# Altium PCB high_voltage_controller.PcbDoc (part 2 of 4)
Units mil, origin at the board's own origin, x right, y up, seen from the top; angles counter-clockwise.
Board outline 3135 x 1815 mil, 4 copper layers (Signal 1, Ground, Power, Signal 2), stack 23.756 mil thick; 57 components, 42 nets, 253 pads, 87 vias.
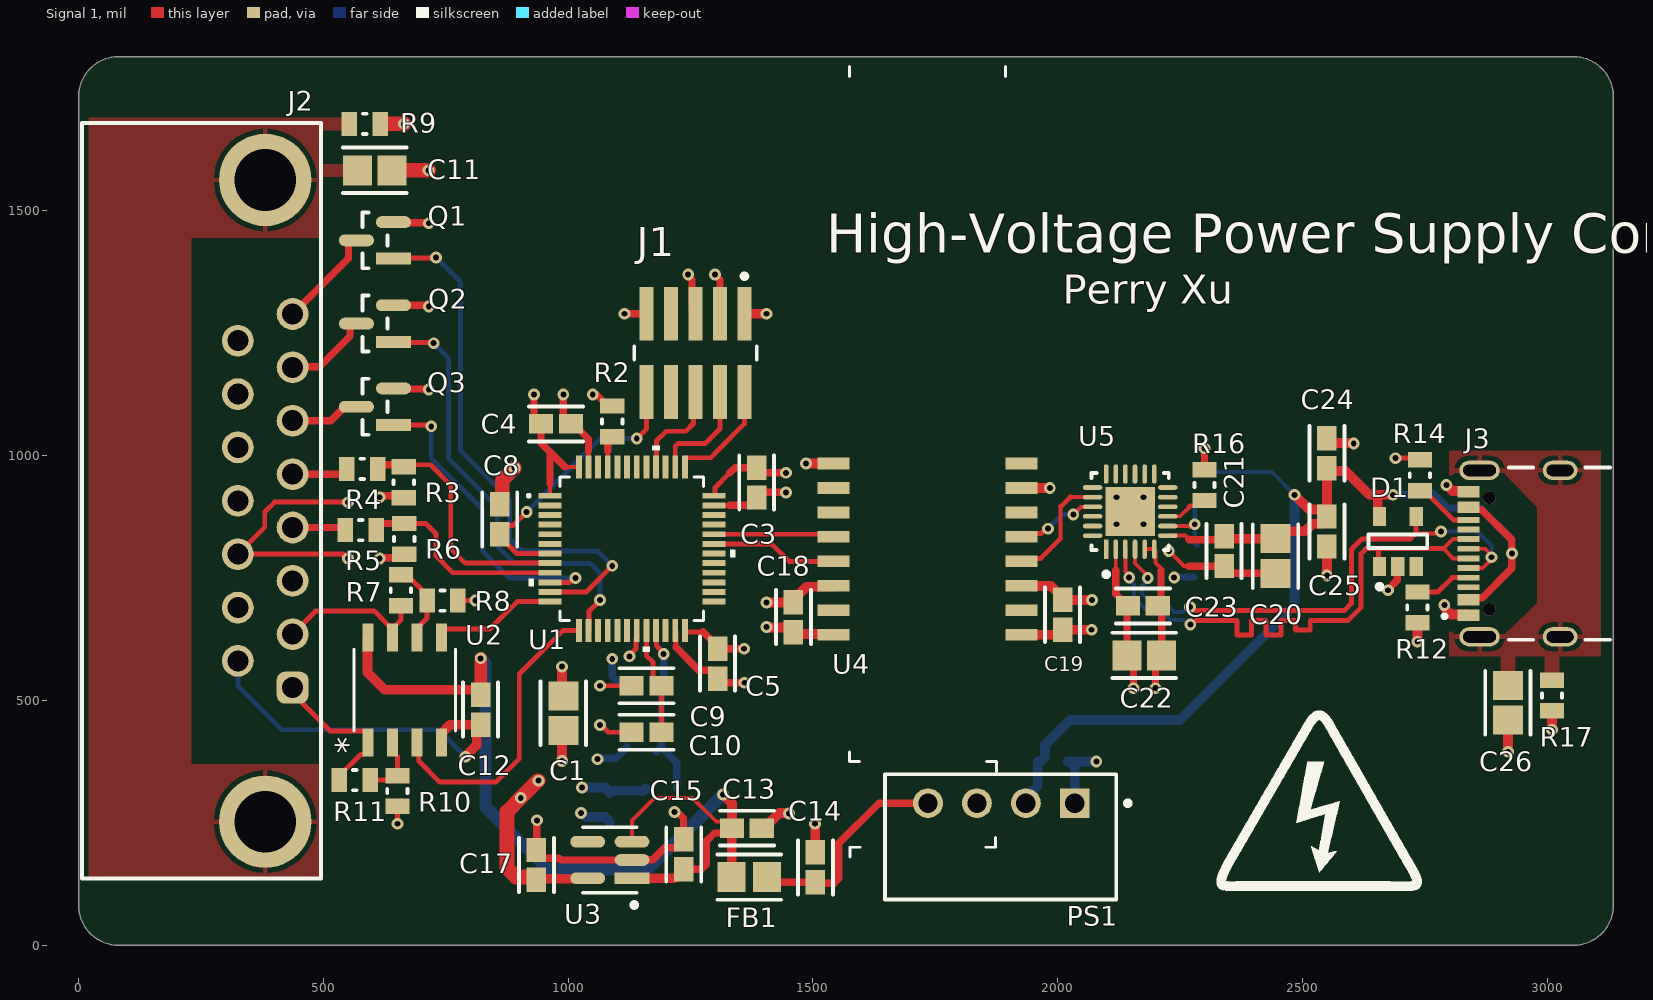
[diagram p0: Signal 1 view]

## Part data (continued)
C12 C15 C17: library part CC0603KRX7R7BB105, "16V 1uF X7R ±10% 0603 Multilayer Ceramic Capacitors MLCC - SMD/SMT ROHS", Case Code (Imperial)=0603, Case Code (Metric)=1608, Dielectric=X7R, Dielectric Material=Ceramic, Manufacturer="Yageo Group", Max Operating Temperature=125°C, Min Operating Temperature=-55°C, Supplier Part Number=311-1446-1-ND, Tolerance=10%, Voltage=16V, Case/Package=0603, Category="Ceramic Capacitors", China RoHS=Compliant, ComponentLink1Description=https://datasheet.octopart.com:443/CC0603KRX7R7BB105-Yageo-datasheet-177165144.pdf?src-supplier=IHS, ComponentLink1URL=https://datasheet.octopart.com:443/CC0603KRX7R7BB105-Yageo-datasheet-177165144.pdf?src-supplier=IHS, ComponentLink2Description=https://datasheet.octopart.com:443/CC0603KRX7R7BB105-Yageo-datasheet-82288757.pdf?src-supplier=Upverter, ComponentLink2URL=https://datasheet.octopart.com:443/CC0603KRX7R7BB105-Yageo-datasheet-82288757.pdf?src-supplier=Upverter, ComponentLink3Description=https://datasheet.octopart.com/CC0603KRX7R7BB105-Yageo-datasheet-10883670.pdf, ComponentLink3URL=https://datasheet.octopart.com/CC0603KRX7R7BB105-Yageo-datasheet-10883670.pdf, ComponentLink4Description=https://datasheet.octopart.com/CC0603KRX7R7BB105-Yageo-datasheet-12526321.pdf, ComponentLink4URL=https://datasheet.octopart.com/CC0603KRX7R7BB105-Yageo-datasheet-12526321.pdf, ComponentLink5Description=https://datasheet.octopart.com:443/CC0603KRX7R7BB105-Yageo-datasheet-181968648.pdf?src-supplier=Newark, ComponentLink5URL=https://datasheet.octopart.com:443/CC0603KRX7R7BB105-Yageo-datasheet-181968648.pdf?src-supplier=Newark, ComponentLink6Description=https://datasheet.octopart.com:443/CC0603KRX7R7BB105-Yageo-datasheet-181968639.pdf?src-supplier=Newark, ComponentLink6URL=https://datasheet.octopart.com:443/CC0603KRX7R7BB105-Yageo-datasheet-181968639.pdf?src-supplier=Newark, ComponentLink7Description=https://datasheet.octopart.com:443/CC0603KRX7R7BB105-Yageo-datasheet-519481.pdf?src-supplier=Newark, ComponentLink7URL=https://datasheet.octopart.com:443/CC0603KRX7R7BB105-Yageo-datasheet-519481.pdf?src-supplier=Newark, ComponentLink8Description=https://datasheet.octopart.com:443/CC0603KRX7R7BB105-Yageo-datasheet-147453679.pdf?src-supplier=Newark, ComponentLink8URL=https://datasheet.octopart.com:443/CC0603KRX7R7BB105-Yageo-datasheet-147453679.pdf?src-supplier=Newark, ComponentLink9Description=https://datasheet.octopart.com:443/CC0603KRX7R7BB105-Yageo-datasheet-62336348.pdf?src-supplier=Farnell, ComponentLink9URL=https://datasheet.octopart.com:443/CC0603KRX7R7BB105-Yageo-datasheet-62336348.pdf?src-supplier=Farnell, ComponentLink10Description=https://datasheet.octopart.com:443/CC0603KRX7R7BB105-Yageo-datasheet-151948686.pdf?src-supplier=Farnell, ComponentLink10URL=https://datasheet.octopart.com:443/CC0603KRX7R7BB105-Yageo-datasheet-151948686.pdf?src-supplier=Farnell, ComponentLink11Description=https://datasheet.octopart.com:443/CC0603KRX7R7BB105-Yageo-datasheet-15895757.pdf?src-supplier=element14+APAC, ComponentLink11URL=https://datasheet.octopart.com:443/CC0603KRX7R7BB105-Yageo-datasheet-15895757.pdf?src-supplier=element14+APAC, ComponentLink12Description=https://datasheet.octopart.com:443/CC0603KRX7R7BB105-Yageo-datasheet-166511530.pdf?src-supplier=Future+Electronics, ComponentLink12URL=https://datasheet.octopart.com:443/CC0603KRX7R7BB105-Yageo-datasheet-166511530.pdf?src-supplier=Future+Electronics, ComponentLink13Description=https://datasheet.octopart.com:443/CC0603KRX7R7BB105-Yageo-datasheet-137700082.pdf?src-supplier=Future+Electronics, ComponentLink13URL=https://datasheet.octopart.com:443/CC0603KRX7R7BB105-Yageo-datasheet-137700082.pdf?src-supplier=Future+Electronics, ComponentLink14Description=https://datasheet.octopart.com:443/CC0603KRX7R7BB105-Yageo-datasheet-137700084.pdf?src-supplier=Future+Electronics, ComponentLink14URL=https://datasheet.octopart.com:443/CC0603KRX7R7BB105-Yageo-datasheet-137700084.pdf?src-supplier=Future+Electronics, ComponentLink15Description=https://datasheet.octopart.com:443/CC0603KRX7R7BB105-Yageo-datasheet-27626582.pdf?src-supplier=Future+Electronics, ComponentLink15URL=https://datasheet.octopart.com:443/CC0603KRX7R7BB105-Yageo-datasheet-27626582.pdf?src-supplier=Future+Electronics, ComponentLink16Description=https://datasheet.octopart.com:443/CC0603KRX7R7BB105-Yageo-Group-datasheet-165992755.pdf?src-supplier=ODG+(Origin+Data+Global), ComponentLink16URL=https://datasheet.octopart.com:443/CC0603KRX7R7BB105-Yageo-Group-datasheet-165992755.pdf?src-supplier=ODG+(Origin+Data+Global), ComponentLink17Description=https://datasheet.octopart.com:443/CC0603KRX7R7BB105-Yageo-datasheet-140260305.pdf?src-supplier=SOS+electronic, ComponentLink17URL=https://datasheet.octopart.com:443/CC0603KRX7R7BB105-Yageo-datasheet-140260305.pdf?src-supplier=SOS+electronic, ComponentLink18Description=https://datasheet.octopart.com:443/CC0603KRX7R7BB105-Yageo-datasheet-8701427.pdf?src-supplier=element14, ComponentLink18URL=https://datasheet.octopart.com:443/CC0603KRX7R7BB105-Yageo-datasheet-8701427.pdf?src-supplier=element14, ComponentLink19Description=https://datasheet.octopart.com:443/CC0603KRX7R7BB105-Yageo-datasheet-499490.pdf?src-supplier=element14, ComponentLink19URL=https://datasheet.octopart.com:443/CC0603KRX7R7BB105-Yageo-datasheet-499490.pdf?src-supplier=element14, ComponentLink20Description=https://datasheet.octopart.com:443/CC0603KRX7R7BB105-Yageo-datasheet-5301394.pdf?src-supplier=element14, ComponentLink20URL=https://datasheet.octopart.com:443/CC0603KRX7R7BB105-Yageo-datasheet-5301394.pdf?src-supplier=element14, ComponentLink21Description=https://datasheet.octopart.com:443/CC0603KRX7R7BB105-Yageo-datasheet-17600895.pdf?src-supplier=TME, ComponentLink21URL=https://datasheet.octopart.com:443/CC0603KRX7R7BB105-Yageo-datasheet-17600895.pdf?src-supplier=TME, ComponentLink22Description=http://sigma.octopart.com:80/rohs_statement/Surface-Mount-Ceramic-Multilayer-Capacitors%3B-General-Purpose-%26-High-Capacitance-Class-2%2C-X7R-Yageo-family-124.pdf?src-supplier=Compliance+Statements, ComponentLink22URL=http://sigma.octopart.com:80/rohs_statement/Surface-Mount-Ceramic-Multilayer-Capacitors%3B-General-Purpose-%26-High-Capacitance-Class-2%2C-X7R-Yageo-family-124.pdf?src-supplier=Compliance+Statements, ComponentLink23Description=http://sigma.octopart.com:80/reach_statement/Surface-Mount-Ceramic-Multilayer-Capacitors%3B-General-Purpose-%26-High-Capacitance-Class-2%2C-X7R-Yageo-family-125.pdf?src-supplier=Compliance+Statements, ComponentLink23URL=http://sigma.octopart.com:80/reach_statement/Surface-Mount-Ceramic-Multilayer-Capacitors%3B-General-Purpose-%26-High-Capacitance-Class-2%2C-X7R-Yageo-family-125.pdf?src-supplier=Compliance+Statements, ComponentLink24Description=http://sigma.octopart.com:80/conflict_mineral_statement/Yageo-company-3.pdf?src-supplier=Compliance+Statements, ComponentLink24URL=http://sigma.octopart.com:80/conflict_mineral_statement/Yageo-company-3.pdf?src-supplier=Compliance+Statements, ComponentLink25Description=http://sigma.octopart.com:80/rohs_statement/Yageo-company-2.pdf?src-supplier=Compliance+Statements, ComponentLink25URL=http://sigma.octopart.com:80/rohs_statement/Yageo-company-2.pdf?src-supplier=Compliance+Statements, Composition=Ceramic, Country of Origin="Mainland China, Taiwan", Depth=800µm, Dissipation Factor=5%, Export Control Classification Number (ECCN) Code=EAR99, Halogen Free="Halogen Free", Harmonized Tariff Schedule (HTS) Code=8532.24.00.20, Height=800µm, Introduction Date=2009-04-17, Lead Free="Lead Free", Length=1.6mm, Lifecycle Status=Production, Manufacturer Part Number=CC0603KRX7R7BB105, Material=Ceramic, Mounting Technology="Surface Mount", Number of Terminals=2, Pins=2, Pricing="1=0.13, 10=0.073, 50=0.0508, 100=0.044, 500=0.0327, 1000=0.02922 (USD)", Radiation Hardening=No, REACH SVHC=Yes, RoHS=Compliant, Schedule B="8532240020, 8532240020|8532240020, 8532240020|8532240020|8532240020, 8532240020|8532240020|8532240020|8532240020", Stock=6886746, Supplier=DigiKey, Supplier 1=DigiKey, Supplier Part Number 1=311-1446-1-ND, Termination=SMD/SMT, Thickness=889µm, Voltage Rating=16V, Voltage Rating (DC)=16V, Width=800µm
C13 C14 C16 C25: library part CC0603MRX5R7BB106, "Multilayer Ceramic Capacitors MLCC – SMD/SMT; YAGEO; CC0603MRX5R7BB106; 10 µF; 0603; 16 V; 16 V", Case Code (Imperial)=0603, Case Code (Metric)=1608, Dielectric=X5R, Dielectric Material=Ceramic, Manufacturer="Yageo Group", Max Operating Temperature=85°C, Min Operating Temperature=-55°C, Supplier Part Number=311-1822-1-ND, Tolerance=20%, Voltage Rating=16V, Case/Package=0603, Category="Ceramic Capacitors", China RoHS=Compliant, ComponentLink1Description=https://datasheet.octopart.com:443/CC0603MRX5R7BB106-Yageo-datasheet-170350636.pdf?src-supplier=IHS, ComponentLink1URL=https://datasheet.octopart.com:443/CC0603MRX5R7BB106-Yageo-datasheet-170350636.pdf?src-supplier=IHS, ComponentLink2Description=https://datasheet.octopart.com:443/CC0603MRX5R7BB106-Yageo-datasheet-182029744.pdf?src-supplier=Farnell, ComponentLink2URL=https://datasheet.octopart.com:443/CC0603MRX5R7BB106-Yageo-datasheet-182029744.pdf?src-supplier=Farnell, ComponentLink3Description=https://datasheet.octopart.com:443/CC0603MRX5R7BB106-Yageo-datasheet-182029743.pdf?src-supplier=Farnell, ComponentLink3URL=https://datasheet.octopart.com:443/CC0603MRX5R7BB106-Yageo-datasheet-182029743.pdf?src-supplier=Farnell, ComponentLink4Description=https://datasheet.octopart.com:443/CC0603MRX5R7BB106-Yageo-datasheet-158238148.pdf?src-supplier=JRH+Electronics, ComponentLink4URL=https://datasheet.octopart.com:443/CC0603MRX5R7BB106-Yageo-datasheet-158238148.pdf?src-supplier=JRH+Electronics, ComponentLink5Description=https://datasheet.octopart.com/CC0603MRX5R7BB106-Yageo-datasheet-86397281.pdf, ComponentLink5URL=https://datasheet.octopart.com/CC0603MRX5R7BB106-Yageo-datasheet-86397281.pdf, ComponentLink6Description=https://datasheet.octopart.com:443/CC0603MRX5R7BB106-Yageo-Group-datasheet-175963154.pdf?src-supplier=Newark, ComponentLink6URL=https://datasheet.octopart.com:443/CC0603MRX5R7BB106-Yageo-Group-datasheet-175963154.pdf?src-supplier=Newark, ComponentLink7Description=https://datasheet.octopart.com:443/CC0603MRX5R7BB106-Yageo-Group-datasheet-145016144.pdf?src-supplier=ODG+(Origin+Data+Global), ComponentLink7URL=https://datasheet.octopart.com:443/CC0603MRX5R7BB106-Yageo-Group-datasheet-145016144.pdf?src-supplier=ODG+(Origin+Data+Global), ComponentLink8Description=https://datasheet.octopart.com:443/CC0603MRX5R7BB106-Yageo-datasheet-137875056.pdf?src-supplier=Future+Electronics, ComponentLink8URL=https://datasheet.octopart.com:443/CC0603MRX5R7BB106-Yageo-datasheet-137875056.pdf?src-supplier=Future+Electronics, ComponentLink9Description=https://datasheet.octopart.com:443/CC0603MRX5R7BB106-Yageo-datasheet-78855687.pdf?src-supplier=Future+Electronics, ComponentLink9URL=https://datasheet.octopart.com:443/CC0603MRX5R7BB106-Yageo-datasheet-78855687.pdf?src-supplier=Future+Electronics, ComponentLink10Description=https://datasheet.octopart.com:443/CC0603MRX5R7BB106-Yageo-datasheet-62067349.pdf?src-supplier=Future+Electronics, ComponentLink10URL=https://datasheet.octopart.com:443/CC0603MRX5R7BB106-Yageo-datasheet-62067349.pdf?src-supplier=Future+Electronics, ComponentLink11Description=https://datasheet.octopart.com:443/CC0603MRX5R7BB106-Yageo-datasheet-68071816.pdf?src-supplier=Future+Electronics, ComponentLink11URL=https://datasheet.octopart.com:443/CC0603MRX5R7BB106-Yageo-datasheet-68071816.pdf?src-supplier=Future+Electronics, ComponentLink12Description=https://datasheet.octopart.com:443/CC0603MRX5R7BB106-Yageo-datasheet-68297942.pdf?src-supplier=Future+Electronics, ComponentLink12URL=https://datasheet.octopart.com:443/CC0603MRX5R7BB106-Yageo-datasheet-68297942.pdf?src-supplier=Future+Electronics, ComponentLink13Description=https://datasheet.octopart.com:443/CC0603MRX5R7BB106-Yageo-Group-datasheet-192360830.pdf?src-supplier=Future+Electronics, ComponentLink13URL=https://datasheet.octopart.com:443/CC0603MRX5R7BB106-Yageo-Group-datasheet-192360830.pdf?src-supplier=Future+Electronics, ComponentLink14Description=http://sigma.octopart.com:80/conflict_mineral_statement/Yageo-company-3.pdf?src-supplier=Compliance+Statements, ComponentLink14URL=http://sigma.octopart.com:80/conflict_mineral_statement/Yageo-company-3.pdf?src-supplier=Compliance+Statements, ComponentLink15Description=http://sigma.octopart.com:80/rohs_statement/Yageo-company-2.pdf?src-supplier=Compliance+Statements, ComponentLink15URL=http://sigma.octopart.com:80/rohs_statement/Yageo-company-2.pdf?src-supplier=Compliance+Statements, Halogen Free="Halogen Free", Height=800µm, Lead Free="Lead Free", Length=1.6mm, Lifecycle Status=Production, Manufacturer Part Number=CC0603MRX5R7BB106, Mounting Technology="Surface Mount", Number of Terminals=2, Packaging="Tape & Reel (TR)", Pricing="1=0.41, 10=0.248, 50=0.1834, 100=0.1635, 500=0.13006, 1000=0.11973 (USD)", REACH SVHC=Yes, RoHS=Compliant, Stock=24512, Supplier=DigiKey, Supplier 1=DigiKey, Supplier Part Number 1=311-1822-1-ND, Termination=SMD/SMT, Thickness=889µm, Voltage Rating (DC)=16V, Weight=2.012816mg, Width=800µm
D1: "SP050xBA Series 8 V 30 pF Uni-Directional SMT TVS Avalanche Diode Array SOT-23-5", Breakdown Voltage=5.5V, Case/Package=SOT-23, Clamping Voltage=6.8V, Leakage Current=100nA, Manufacturer=Littelfuse, Max Operating Temperature=125°C, Max Power Dissipation=225mW, Min Operating Temperature=-40°C, Peak Pulse Power=25W, Power Line Protection=No, Supplier Part Number=F3157CT-ND, Voltage Rating (DC)=5V, Category="TVS Diodes", ComponentLink1Description=https://datasheet.octopart.com:443/SP0504BAHTG-Littelfuse-datasheet-180609594.pdf?src-supplier=IHS, ComponentLink1URL=https://datasheet.octopart.com:443/SP0504BAHTG-Littelfuse-datasheet-180609594.pdf?src-supplier=IHS, ComponentLink2Description=https://datasheet.octopart.com:443/SP0504BAHTG-Littelfuse-datasheet-137315643.pdf?src-supplier=JRH+Electronics, ComponentLink2URL=https://datasheet.octopart.com:443/SP0504BAHTG-Littelfuse-datasheet-137315643.pdf?src-supplier=JRH+Electronics, ComponentLink3Description=https://datasheet.octopart.com:443/SP0504BAHTG-Littelfuse-datasheet-65933529.pdf?src-supplier=element14+APAC, ComponentLink3URL=https://datasheet.octopart.com:443/SP0504BAHTG-Littelfuse-datasheet-65933529.pdf?src-supplier=element14+APAC, ComponentLink4Description=https://datasheet.octopart.com:443/SP0504BAHTG-Littelfuse-datasheet-14434284.pdf?src-supplier=element14+APAC, ComponentLink4URL=https://datasheet.octopart.com:443/SP0504BAHTG-Littelfuse-datasheet-14434284.pdf?src-supplier=element14+APAC, ComponentLink5Description=https://datasheet.octopart.com:443/SP0504BAHTG-Littelfuse-datasheet-165517320.pdf?src-supplier=Newark, ComponentLink5URL=https://datasheet.octopart.com:443/SP0504BAHTG-Littelfuse-datasheet-165517320.pdf?src-supplier=Newark, ComponentLink6Description=https://datasheet.octopart.com:443/SP0504BAHTG-Littelfuse-datasheet-8328482.pdf?src-supplier=Newark, ComponentLink6URL=https://datasheet.octopart.com:443/SP0504BAHTG-Littelfuse-datasheet-8328482.pdf?src-supplier=Newark, ComponentLink7Description=https://datasheet.octopart.com:443/SP0504BAHTG-Littelfuse-datasheet-32996.pdf?src-supplier=Newark, ComponentLink7URL=https://datasheet.octopart.com:443/SP0504BAHTG-Littelfuse-datasheet-32996.pdf?src-supplier=Newark, ComponentLink8Description=https://datasheet.octopart.com:443/SP0504BAHTG-Littelfuse-datasheet-173467575.pdf?src-supplier=Future+Electronics, ComponentLink8URL=https://datasheet.octopart.com:443/SP0504BAHTG-Littelfuse-datasheet-173467575.pdf?src-supplier=Future+Electronics, ComponentLink9Description=https://datasheet.octopart.com:443/SP0504BAHTG-Littelfuse-datasheet-125842.pdf?src-supplier=Future+Electronics, ComponentLink9URL=https://datasheet.octopart.com:443/SP0504BAHTG-Littelfuse-datasheet-125842.pdf?src-supplier=Future+Electronics, ComponentLink10Description=https://datasheet.octopart.com:443/SP0504BAHTG-Littelfuse-datasheet-43099464.pdf?src-supplier=RS+(Formerly+Allied+Electronics), ComponentLink10URL=https://datasheet.octopart.com:443/SP0504BAHTG-Littelfuse-datasheet-43099464.pdf?src-supplier=RS+(Formerly+Allied+Electronics), ComponentLink11Description=https://datasheet.octopart.com:443/SP0504BAHTG-Littelfuse-datasheet-14049100.pdf?src-supplier=iiiC, ComponentLink11URL=https://datasheet.octopart.com:443/SP0504BAHTG-Littelfuse-datasheet-14049100.pdf?src-supplier=iiiC, ComponentLink12Description=https://datasheet.octopart.com:443/SP0504BAHTG-Littelfuse-datasheet-8817999.pdf?src-supplier=Farnell, ComponentLink12URL=https://datasheet.octopart.com:443/SP0504BAHTG-Littelfuse-datasheet-8817999.pdf?src-supplier=Farnell, ComponentLink13Description=https://datasheet.octopart.com:443/SP0504BAHTG-Littelfuse-datasheet-622385.pdf?src-supplier=Fuses+Unlimited, ComponentLink13URL=https://datasheet.octopart.com:443/SP0504BAHTG-Littelfuse-datasheet-622385.pdf?src-supplier=Fuses+Unlimited, Composition=Zener, Country of Origin="Mainland China", Depth=1.75mm, Diode Type=Avalanche, Direction=Unidirectional, Element Configuration="Common Anode", ESD Protection=Yes, Export Control Classification Number (ECCN) Code=EAR99, Harmonized Tariff Schedule (HTS) Code=8541.10.00.50, Height=1.45mm, Introduction Date=2002-07-25, Lead Free="Lead Free", Length=3.05mm, Lifecycle Status=Production, Manufacturer Part Number=SP0504BAHTG, Max Reverse Leakage Current=100nA, Mounting Technology="Surface Mount", Number of Channels=4, Number of Elements=4, Number of Terminals=5, Number of Unidirectional Channels=4, Operating Supply Voltage=5.5V, Packaging="Cut Tape", Pins=5, Polarity=Unidirectional, Power Dissipation=225mW, Pricing="1=1.59, 10=1.003, 100=0.6666, 500=0.52224, 1000=0.47578 (USD)", Radiation Hardening=No, REACH SVHC=Yes, Reverse Standoff Voltage=5.5V, RoHS=Compliant, Schedule B="8536300000, 8536300000|8536300000, 8536300000|8536300000|8536300000, 8536300000|8536300000|8536300000|8536300000", Stock=1174, Supplier=DigiKey, Supplier 1=DigiKey, Supplier Part Number 1=F3157CT-ND, Termination=SMD/SMT, Width=1.75mm, Working Voltage=5.5V
FB1: "Ferrite Beads Multi-Layer 220Ohm 25% 100MHz 2A 45mOhm DCR 0805 Paper T/R", Case Code (Imperial)=0805, Case Code (Metric)=2012, Clock Frequency=100MHz, Current=2A, DC Resistance (DCR)=50mΩ, Manufacturer=Murata, Manufacturer Package Identifier="0805 (2012 metric)", Max Operating Temperature=125°C, Min Operating Temperature=-55°C, Supplier Part Number=490-1054-1-ND, Tolerance=25%, Case/Package=0805, Category="Ferrite Beads and Chips", ComponentLink1Description=https://datasheet.octopart.com:443/BLM21PG221SN1D-Murata-datasheet-114786051.pdf?src-supplier=Upverter, ComponentLink1URL=https://datasheet.octopart.com:443/BLM21PG221SN1D-Murata-datasheet-114786051.pdf?src-supplier=Upverter, ComponentLink2Description=https://datasheet.octopart.com:443/BLM21PG221SN1D-Murata-datasheet-12522583.pdf?src-supplier=Upverter, ComponentLink2URL=https://datasheet.octopart.com:443/BLM21PG221SN1D-Murata-datasheet-12522583.pdf?src-supplier=Upverter, ComponentLink3Description=https://datasheet.octopart.com:443/BLM21PG221SN1D-Murata-datasheet-10083551.pdf?src-supplier=Upverter, ComponentLink3URL=https://datasheet.octopart.com:443/BLM21PG221SN1D-Murata-datasheet-10083551.pdf?src-supplier=Upverter, ComponentLink4Description=https://datasheet.octopart.com:443/BLM21PG221SN1D-Murata-datasheet-8508678.pdf?src-supplier=Upverter, ComponentLink4URL=https://datasheet.octopart.com:443/BLM21PG221SN1D-Murata-datasheet-8508678.pdf?src-supplier=Upverter, ComponentLink5Description=https://datasheet.octopart.com:443/BLM21PG221SN1D-Murata-datasheet-166171482.pdf?src-supplier=IHS, ComponentLink5URL=https://datasheet.octopart.com:443/BLM21PG221SN1D-Murata-datasheet-166171482.pdf?src-supplier=IHS, ComponentLink6Description=https://datasheet.octopart.com:443/BLM21PG221SN1D-Murata-datasheet-11743916.pdf?src-supplier=SOS+electronic, ComponentLink6URL=https://datasheet.octopart.com:443/BLM21PG221SN1D-Murata-datasheet-11743916.pdf?src-supplier=SOS+electronic, ComponentLink7Description=https://datasheet.octopart.com:443/BLM21PG221SN1D-Murata-datasheet-37129980.pdf?src-supplier=element14+APAC, ComponentLink7URL=https://datasheet.octopart.com:443/BLM21PG221SN1D-Murata-datasheet-37129980.pdf?src-supplier=element14+APAC, ComponentLink8Description=https://datasheet.octopart.com:443/BLM21PG221SN1D-Murata-datasheet-53019.pdf?src-supplier=TME, ComponentLink8URL=https://datasheet.octopart.com:443/BLM21PG221SN1D-Murata-datasheet-53019.pdf?src-supplier=TME, ComponentLink9Description=https://datasheet.octopart.com:443/BLM21PG221SN1D-Murata-datasheet-135086726.pdf?src-supplier=TME, ComponentLink9URL=https://datasheet.octopart.com:443/BLM21PG221SN1D-Murata-datasheet-135086726.pdf?src-supplier=TME, ComponentLink10Description=https://datasheet.octopart.com:443/BLM21PG221SN1D-Murata-datasheet-8359900.pdf?src-supplier=_legacy+Avnet, ComponentLink10URL=https://datasheet.octopart.com:443/BLM21PG221SN1D-Murata-datasheet-8359900.pdf?src-supplier=_legacy+Avnet, ComponentLink11Description=https://datasheet.octopart.com:443/BLM21PG221SN1D-Murata-datasheet-554271.pdf?src-supplier=_legacy+Avnet, ComponentLink11URL=https://datasheet.octopart.com:443/BLM21PG221SN1D-Murata-datasheet-554271.pdf?src-supplier=_legacy+Avnet, ComponentLink12Description=https://datasheet.octopart.com:443/BLM21PG221SN1D-Murata-datasheet-141258121.pdf?src-supplier=Ciiva, ComponentLink12URL=https://datasheet.octopart.com:443/BLM21PG221SN1D-Murata-datasheet-141258121.pdf?src-supplier=Ciiva, ComponentLink13Description=https://datasheet.octopart.com:443/BLM21PG221SN1D-Murata-datasheet-138707416.pdf?src-supplier=Ciiva, ComponentLink13URL=https://datasheet.octopart.com:443/BLM21PG221SN1D-Murata-datasheet-138707416.pdf?src-supplier=Ciiva, ComponentLink14Description=https://datasheet.octopart.com:443/BLM21PG221SN1D-Murata-datasheet-83134203.pdf?src-supplier=Megastar, ComponentLink14URL=https://datasheet.octopart.com:443/BLM21PG221SN1D-Murata-datasheet-83134203.pdf?src-supplier=Megastar, ComponentLink15Description=https://datasheet.octopart.com:443/BLM21PG221SN1D-Murata-datasheet-62086381.pdf?src-supplier=Future+Electronics, ComponentLink15URL=https://datasheet.octopart.com:443/BLM21PG221SN1D-Murata-datasheet-62086381.pdf?src-supplier=Future+Electronics, ComponentLink16Description=https://datasheet.octopart.com:443/BLM21PG221SN1D-Murata-datasheet-14066484.pdf?src-supplier=iiiC, ComponentLink16URL=https://datasheet.octopart.com:443/BLM21PG221SN1D-Murata-datasheet-14066484.pdf?src-supplier=iiiC, ComponentLink17Description=https://datasheet.octopart.com:443/BLM21PG221SN1D-Murata-datasheet-8197962.pdf?src-supplier=Jameco, ComponentLink17URL=https://datasheet.octopart.com:443/BLM21PG221SN1D-Murata-datasheet-8197962.pdf?src-supplier=Jameco, ComponentLink18Description=https://datasheet.octopart.com:443/BLM21PG221SN1D-Murata-datasheet-153769.pdf?src-supplier=Mouser, ComponentLink18URL=https://datasheet.octopart.com:443/BLM21PG221SN1D-Murata-datasheet-153769.pdf?src-supplier=Mouser, ComponentLink19Description=http://sigma.octopart.com:80/reach_statement/Murata-company-16.pdf?src-supplier=Compliance+Statements, ComponentLink19URL=http://sigma.octopart.com:80/reach_statement/Murata-company-16.pdf?src-supplier=Compliance+Statements, Contact Plating=Tin, Core Material=Ferrite, Current Rating=2A, DC Current=2A, Depth=1.25mm, ESR=45mΩ, Frequency=100MHz, Height=850µm, Impedance=220Ω, Lead Free="Lead Free", Length=2mm, Lifecycle Status=Production, Manufacturer Part Number=BLM21PG221SN1D, Material="Ferrite, Steel", Max Current Rating=2A, Max DC Current=2A, Military Standard=Not, Mounting Technology="Surface Mount", Number of Circuits=1, Number of Lines=1, Number of Terminals=2, Packaging="Tape and Reel", Pins=2, Pricing="1=0.11, 10=0.08, 25=0.0696, 50=0.0626, 100=0.0561, 250=0.04828, 500=0.0429, 1000=0.03791 (USD)", Radiation Hardening=No, REACH SVHC=Yes, RMS Current (Irms)=2A, RoHS=Compliant, Schedule B="8504500000, 8504500000|8504500000|8504500000|8504500000|8504500000", Shielding=Unshielded, Stock=1304596, Supplier=DigiKey, Supplier 1=DigiKey, Supplier Part Number 1=490-1054-1-ND, Termination=SMD/SMT, Test Frequency=100MHz, Width=1.25mm
J1: "CONN HEADER SMD 10POS 1.27MM / Connector Header Surface Mount 10 position 0.050\" (1.27mm)", Color=Black, Manufacturer=Samtec, Manufacturer Lifecycle Status=PRODUCTION, Max Current Rating=1.75A, Max Operating Temperature=125°C, Min Operating Temperature=-55°C, Supplier Part Number=SAM8799-ND, Category="Headers and Wire Housings", ComponentLink1Description=https://datasheet.octopart.com:443/FTSH-105-01-L-DV-K-Samtec-datasheet-140825048.pdf?src-supplier=Electro+Sonic, ComponentLink1URL=https://datasheet.octopart.com:443/FTSH-105-01-L-DV-K-Samtec-datasheet-140825048.pdf?src-supplier=Electro+Sonic, ComponentLink2Description=https://datasheet.octopart.com:443/FTSH-105-01-L-DV-K-Samtec-datasheet-86818370.pdf?src-supplier=Upverter, ComponentLink2URL=https://datasheet.octopart.com:443/FTSH-105-01-L-DV-K-Samtec-datasheet-86818370.pdf?src-supplier=Upverter, ComponentLink3Description=https://datasheet.octopart.com:443/FTSH-105-01-L-DV-K-Samtec-datasheet-97029545.pdf?src-supplier=Newark, ComponentLink3URL=https://datasheet.octopart.com:443/FTSH-105-01-L-DV-K-Samtec-datasheet-97029545.pdf?src-supplier=Newark, ComponentLink4Description=https://datasheet.octopart.com:443/FTSH-105-01-L-DV-K-Samtec-datasheet-41642889.pdf?src-supplier=Newark, ComponentLink4URL=https://datasheet.octopart.com:443/FTSH-105-01-L-DV-K-Samtec-datasheet-41642889.pdf?src-supplier=Newark, ComponentLink5Description=https://sigma.octopart.com:443/140871554/technical_drawing/Samtec-FTSH-105-01-L-DV-K.pdf?src-supplier=Samtec, ComponentLink5URL=https://sigma.octopart.com:443/140871554/technical_drawing/Samtec-FTSH-105-01-L-DV-K.pdf?src-supplier=Samtec, ComponentLink6Description=https://sigma.octopart.com:443/97029548/technical_drawing/Samtec-FTSH-105-01-L-DV-K.pdf?src-supplier=Samtec, ComponentLink6URL=https://sigma.octopart.com:443/97029548/technical_drawing/Samtec-FTSH-105-01-L-DV-K.pdf?src-supplier=Samtec, ComponentLink7Description=https://datasheet.octopart.com:443/FTSH-105-01-L-DV-K-Samtec-datasheet-100454331.pdf?src-supplier=Farnell, ComponentLink7URL=https://datasheet.octopart.com:443/FTSH-105-01-L-DV-K-Samtec-datasheet-100454331.pdf?src-supplier=Farnell, ComponentLink8Description=https://datasheet.octopart.com:443/FTSH-105-01-L-DV-K-Samtec-datasheet-33007714.pdf?src-supplier=Farnell, ComponentLink8URL=https://datasheet.octopart.com:443/FTSH-105-01-L-DV-K-Samtec-datasheet-33007714.pdf?src-supplier=Farnell, ComponentLink9Description=https://datasheet.octopart.com:443/FTSH-105-01-L-DV-K-Samtec-datasheet-16646209.pdf?src-supplier=element14+APAC, ComponentLink9URL=https://datasheet.octopart.com:443/FTSH-105-01-L-DV-K-Samtec-datasheet-16646209.pdf?src-supplier=element14+APAC, ComponentLink10Description=https://datasheet.octopart.com:443/FTSH-105-01-L-DV-K-Samtec-datasheet-180249087.pdf?src-supplier=JRH+Electronics, ComponentLink10URL=https://datasheet.octopart.com:443/FTSH-105-01-L-DV-K-Samtec-datasheet-180249087.pdf?src-supplier=JRH+Electronics, ComponentLink11Description=https://datasheet.octopart.com:443/FTSH-105-01-L-DV-K-Samtec-datasheet-176663386.pdf?src-supplier=Toby+Electronics, ComponentLink11URL=https://datasheet.octopart.com:443/FTSH-105-01-L-DV-K-Samtec-datasheet-176663386.pdf?src-supplier=Toby+Electronics, ComponentLink12Description=https://datasheet.octopart.com:443/FTSH-105-01-L-DV-K-Samtec-datasheet-133497664.pdf?src-supplier=Toby+Electronics, ComponentLink12URL=https://datasheet.octopart.com:443/FTSH-105-01-L-DV-K-Samtec-datasheet-133497664.pdf?src-supplier=Toby+Electronics, ComponentLink13Description=https://datasheet.octopart.com:443/FTSH-105-01-L-DV-K-Samtec-datasheet-116535196.pdf?src-supplier=Toby+Electronics, ComponentLink13URL=https://datasheet.octopart.com:443/FTSH-105-01-L-DV-K-Samtec-datasheet-116535196.pdf?src-supplier=Toby+Electronics, ComponentLink14Description=https://datasheet.octopart.com:443/FTSH-105-01-L-DV-K-Samtec-datasheet-151470459.pdf?src-supplier=Sager+Electronics, ComponentLink14URL=https://datasheet.octopart.com:443/FTSH-105-01-L-DV-K-Samtec-datasheet-151470459.pdf?src-supplier=Sager+Electronics, ComponentLink15Description=https://datasheet.octopart.com:443/FTSH-105-01-L-DV-K-Samtec-datasheet-151470458.pdf?src-supplier=Sager+Electronics, ComponentLink15URL=https://datasheet.octopart.com:443/FTSH-105-01-L-DV-K-Samtec-datasheet-151470458.pdf?src-supplier=Sager+Electronics, ComponentLink16Description=https://datasheet.octopart.com:443/FTSH-105-01-L-DV-K-Samtec-datasheet-137316104.pdf?src-supplier=Future+Electronics, ComponentLink16URL=https://datasheet.octopart.com:443/FTSH-105-01-L-DV-K-Samtec-datasheet-137316104.pdf?src-supplier=Future+Electronics, ComponentLink17Description=https://datasheet.octopart.com/FTSH-105-01-L-DV-K-Samtec-datasheet-13696953.pdf, ComponentLink17URL=https://datasheet.octopart.com/FTSH-105-01-L-DV-K-Samtec-datasheet-13696953.pdf, ComponentLink18Description=https://datasheet.octopart.com/FTSH-105-01-L-DV-K-Samtec-datasheet-11553404.pdf, ComponentLink18URL=https://datasheet.octopart.com/FTSH-105-01-L-DV-K-Samtec-datasheet-11553404.pdf, Connector Type="Male Pin", Contact Material=Bronze, Contact Mating Length=3.048mm, Contact Plating=Gold, Depth=3.43mm, Gender=Female, Housing Color=Black, Housing Material=Polymer, Lead Free="Lead Free", Length=6.35mm, Lifecycle Status=Production, Manufacturer Part Number=FTSH-105-01-L-DV-K, Mounting Technology="Surface Mount", Number of Contacts=10, Number of Positions=10, Number of Rows=2, Pins=10, Pitch=1.27mm, Pricing="1=1.37, 100=1.075, 250=0.972, 500=0.855, 1000=0.753, 2500=0.68, 5000=0.607, 10000=0.52375 (USD)", Radiation Hardening=No, REACH SVHC=No, RoHS=Compliant, Row Spacing=1.27mm, Stock=73552, Supplier=DigiKey, Supplier 1=DigiKey, Supplier Part Number 1=SAM8799-ND, Termination=Solder
J2: "15 Way Right Angle Through Hole Pcb D-sub Connector Socket, 2.77MM, 2.84MM Pitch", Contact Resistance=30mΩ, Current Rating=3A, Insulation Resistance=5GΩ, Manufacturer="Wurth Elektronik", Manufacturer Lifecycle Status=ACTIVE, Max Operating Temperature=105°C, Min Operating Temperature=-55°C, Operating Supply Voltage=125V, Supplier Part Number=732-618015231121-ND, Category="D-Sub Connectors", ComponentLink1Description=https://datasheet.octopart.com:443/618015231121-W%C3%BCrth-Elektronik-datasheet-149524395.pdf?src-supplier=Wurth+Elektronik, ComponentLink1URL=https://datasheet.octopart.com:443/618015231121-W%C3%BCrth-Elektronik-datasheet-149524395.pdf?src-supplier=Wurth+Elektronik, ComponentLink2Description=https://datasheet.octopart.com:443/618015231121-W%C3%BCrth-Elektronik-datasheet-111088018.pdf?src-supplier=Wurth+Elektronik, ComponentLink2URL=https://datasheet.octopart.com:443/618015231121-W%C3%BCrth-Elektronik-datasheet-111088018.pdf?src-supplier=Wurth+Elektronik, ComponentLink3Description=https://datasheet.octopart.com:443/618015231121-W%C3%BCrth-Elektronik-Midcom-datasheet-10410299.pdf?src-supplier=Newark, ComponentLink3URL=https://datasheet.octopart.com:443/618015231121-W%C3%BCrth-Elektronik-Midcom-datasheet-10410299.pdf?src-supplier=Newark, ComponentLink4Description=https://datasheet.octopart.com:443/618015231121-W%C3%BCrth-Elektronik-Midcom-datasheet-10413304.pdf?src-supplier=element14+APAC, ComponentLink4URL=https://datasheet.octopart.com:443/618015231121-W%C3%BCrth-Elektronik-Midcom-datasheet-10413304.pdf?src-supplier=element14+APAC, ComponentLink5Description=https://datasheet.octopart.com:443/618015231121-W%C3%BCrth-Elektronik-Midcom-datasheet-10470155.pdf?src-supplier=element14+APAC, ComponentLink5URL=https://datasheet.octopart.com:443/618015231121-W%C3%BCrth-Elektronik-Midcom-datasheet-10470155.pdf?src-supplier=element14+APAC, ComponentLink6Description=https://datasheet.octopart.com:443/618015231121-W%C3%BCrth-Elektronik-Midcom-datasheet-10489568.pdf?src-supplier=Farnell, ComponentLink6URL=https://datasheet.octopart.com:443/618015231121-W%C3%BCrth-Elektronik-Midcom-datasheet-10489568.pdf?src-supplier=Farnell, Contact Plating=Gold, Depth=18.5mm, Gender=Female, Housing Material=Steel, Insulation Material=PBT, Length=24.8mm, Lifecycle Status=Production, Manufacturer Part Number=618015231121, Mounting Technology="Through Hole", Number of Contacts=15, Number of Rows=2, Orientation="Right Angle", Pins=15, Pitch=2.77mm, Pricing="1=4.07, 10=3.857, 50=3.4296, 100=2.9925, 250=2.565, 500=2.2895 (USD)", RoHS=Compliant, Stock=1853, Supplier=DigiKey, Supplier 1=DigiKey, Supplier Part Number 1=732-618015231121-ND, Termination=SMD/SMT, Voltage Rating=125V, Width=12.5mm, YEOL="1 = Estimated lifetime > 10 years"
J3: "USB Connector, 24 Contact(s), Female, Right Angle, Solder Terminal, Locking, Receptacle", Contact Resistance=50mΩ, Current Rating=6.25A, Dielectric Material="Liquid Crystal Polymer", Insulation Color=Black, Insulation Resistance=100MΩ, Manufacturer="Global Connector Technology", Max Operating Temperature=85°C, Min Operating Temperature=-40°C, Supplier Part Number=2073-USB4105-GF-ACT-ND, Voltage Rating=20V, Category="USB Connectors", China RoHS=Compliant, ComponentLink1Description=https://datasheet.octopart.com:443/USB4105-GF-A-GCT-datasheet-166929323.pdf?src-supplier=SOS+electronic, ComponentLink1URL=https://datasheet.octopart.com:443/USB4105-GF-A-GCT-datasheet-166929323.pdf?src-supplier=SOS+electronic, ComponentLink2Description=https://datasheet.octopart.com:443/USB4105-GF-A-GCT-datasheet-188935996.pdf?src-supplier=TME, ComponentLink2URL=https://datasheet.octopart.com:443/USB4105-GF-A-GCT-datasheet-188935996.pdf?src-supplier=TME, ComponentLink3Description=https://datasheet.octopart.com:443/USB4105-GF-A-GCT-datasheet-188869076.pdf?src-supplier=TME, ComponentLink3URL=https://datasheet.octopart.com:443/USB4105-GF-A-GCT-datasheet-188869076.pdf?src-supplier=TME, ComponentLink4Description=https://datasheet.octopart.com:443/USB4105-GF-A-GCT-datasheet-166927665.pdf?src-supplier=TME, ComponentLink4URL=https://datasheet.octopart.com:443/USB4105-GF-A-GCT-datasheet-166927665.pdf?src-supplier=TME, Contact Material="Gold, Nickel", Country of Origin="Mainland China", Export Control Classification Number (ECCN) Code=EAR99, Gender=Female, Harmonized Tariff Schedule (HTS) Code=8536.69.40.30, Height=3.46mm, Introduction Date=2021-04-29, Lifecycle Status=Production, Manufacturer Part Number=USB4105-GF-A, Number of Contacts=16, Number of Ports=1, Number of Positions=24, Number of Rows=1, Orientation="Right Angle", Pins=16, Pricing="1=0.8, 10=0.676, 25=0.6336, 50=0.6034, 100=0.5745, 250=0.53848 (USD)", REACH SVHC=Yes, RoHS=Compliant, Shell Finish=Nickel, Shell Material="Stainless Steel", Stock=153184, Supplier=DigiKey, Supplier 1=DigiKey, Supplier Part Number 1=2073-USB4105-GF-ACT-ND, Terminal Pitch=500µm, USB Standard="USB 2.0"
PS1: "DC DC CONVERTER 5V 1W / Isolated Module DC DC Converter 1 Output 5V 200mA - 5V Input", Case/Package=SMA, Manufacturer="Recom Power", Max Operating Temperature=85°C, Max Output Power=1W, Max Output Voltage=5.25V, Max Supply Voltage=5.5V, Min Input Voltage=4.5V, Min Operating Temperature=-40°C, Min Output Voltage=4.75V, Nominal Output Voltage=5V, Nominal Supply Current=25mA, Output Current=200mA, Supplier Part Number=945-3159-ND, Switching Frequency=80kHz, Temperature Grade=Industrial, Category="Voltage Regulators - Switching", ComponentLink1Description=https://datasheet.octopart.com:443/RFM-0505S-Recom-Power-datasheet-133924900.pdf?src-supplier=Farnell, ComponentLink1URL=https://datasheet.octopart.com:443/RFM-0505S-Recom-Power-datasheet-133924900.pdf?src-supplier=Farnell, ComponentLink2Description=https://datasheet.octopart.com:443/RFM-0505S-Recom-Power-datasheet-104425650.pdf?src-supplier=element14+APAC, ComponentLink2URL=https://datasheet.octopart.com:443/RFM-0505S-Recom-Power-datasheet-104425650.pdf?src-supplier=element14+APAC, Composition=Hybrid, Height=10mm, Height - Seated (Max)=10.5mm, Length=11.5mm, Lifecycle Status=Production, Manufacturer Part Number=RFM-0505S, Max Power Dissipation=1W, Min Supply Voltage=4.5V, Nominal Supply Voltage=5V, Number of Circuits=1, Number of Outputs=1, Number of Terminals=4, Output Power=1W, Output Voltage=5V, Pricing="1=1.96, 5=1.892, 10=1.861, 25=1.8212, 50=1.7918, 100=1.7628, 250=1.72512, 500=1.69706 (USD)", REACH SVHC=Yes, RoHS=Compliant, Schedule B="8504409580, 8504409580|8504409580|8504409580|8504409580|8504409580", Stock=10396, Supplier=DigiKey, Supplier 1="Future Electronics", Supplier Part Number 1=RFM-0505S, Terminal Pitch=2.54mm, Weight=1.4g, Width=6mm
Q1 Q2 Q3: "Mosfet N-ch 60V 300MA SOT23 / Trans Mosfet N-ch 60V 0.3A 3-PIN SOT-23 T/r", Case/Package=SOT-23, Continuous Drain Current (ID)=115mA, Current=3A, Drain to Source Breakdown Voltage=60V, Drain to Source Resistance=2Ω, Gate to Source Voltage (Vgs)=20V, Input Capacitance=50pF, Manufacturer=onsemi, Manufacturer Lifecycle Status=ACTIVE, Max Junction Temperature (Tj)=150°C, Max Power Dissipation=350W, Min Operating Temperature=-55°C, Power Dissipation=300mW, Supplier Part Number=2N7002KCT-ND, Threshold Voltage=2.5V, Category=MOSFETs, China RoHS=Compliant, ComponentLink1Description=https://datasheet.octopart.com:443/2N7002K-onsemi-datasheet-180957336.pdf?src-supplier=IHS, ComponentLink1URL=https://datasheet.octopart.com:443/2N7002K-onsemi-datasheet-180957336.pdf?src-supplier=IHS, ComponentLink2Description=https://datasheet.octopart.com:443/2N7002K-Fairchild-Semiconductor-datasheet-34208596.pdf?src-supplier=IHS, ComponentLink2URL=https://datasheet.octopart.com:443/2N7002K-Fairchild-Semiconductor-datasheet-34208596.pdf?src-supplier=IHS, ComponentLink3Description=https://datasheet.octopart.com:443/2N7002K-ON-Semiconductor-datasheet-138897972.pdf?src-supplier=onsemi, ComponentLink3URL=https://datasheet.octopart.com:443/2N7002K-ON-Semiconductor-datasheet-138897972.pdf?src-supplier=onsemi, ComponentLink4Description=https://datasheet.octopart.com:443/2N7002K-ON-Semiconductor-datasheet-147841327.pdf?src-supplier=onsemi, ComponentLink4URL=https://datasheet.octopart.com:443/2N7002K-ON-Semiconductor-datasheet-147841327.pdf?src-supplier=onsemi, ComponentLink5Description=https://datasheet.octopart.com:443/2N7002K-ON-Semiconductor-datasheet-81464098.pdf?src-supplier=onsemi, ComponentLink5URL=https://datasheet.octopart.com:443/2N7002K-ON-Semiconductor-datasheet-81464098.pdf?src-supplier=onsemi, ComponentLink6Description=https://datasheet.octopart.com:443/2N7002K-ON-Semiconductor-datasheet-8636720.pdf?src-supplier=onsemi, ComponentLink6URL=https://datasheet.octopart.com:443/2N7002K-ON-Semiconductor-datasheet-8636720.pdf?src-supplier=onsemi, ComponentLink7Description=https://sigma.octopart.com:443/138897241/technical_drawing/ON-Semiconductor-2N7002K.pdf?src-supplier=Upverter, ComponentLink7URL=https://sigma.octopart.com:443/138897241/technical_drawing/ON-Semiconductor-2N7002K.pdf?src-supplier=Upverter, ComponentLink8Description=https://datasheet.octopart.com:443/2N7002K-ON-Semiconductor-datasheet-13704821.pdf?src-supplier=element14+APAC, ComponentLink8URL=https://datasheet.octopart.com:443/2N7002K-ON-Semiconductor-datasheet-13704821.pdf?src-supplier=element14+APAC, ComponentLink9Description=https://datasheet.octopart.com:443/2N7002K-ON-Semiconductor-datasheet-86682065.pdf?src-supplier=element14+APAC, ComponentLink9URL=https://datasheet.octopart.com:443/2N7002K-ON-Semiconductor-datasheet-86682065.pdf?src-supplier=element14+APAC, ComponentLink10Description=https://datasheet.octopart.com:443/2N7002K-onsemi-datasheet-181958640.pdf?src-supplier=Newark, ComponentLink10URL=https://datasheet.octopart.com:443/2N7002K-onsemi-datasheet-181958640.pdf?src-supplier=Newark, ComponentLink11Description=https://datasheet.octopart.com:443/2N7002K-Fairchild-Semiconductor-datasheet-67650041.pdf?src-supplier=Newark, ComponentLink11URL=https://datasheet.octopart.com:443/2N7002K-Fairchild-Semiconductor-datasheet-67650041.pdf?src-supplier=Newark, ComponentLink12Description=https://datasheet.octopart.com:443/2N7002K-Fairchild-Semiconductor-datasheet-68365086.pdf?src-supplier=Newark, ComponentLink12URL=https://datasheet.octopart.com:443/2N7002K-Fairchild-Semiconductor-datasheet-68365086.pdf?src-supplier=Newark, ComponentLink13Description=https://datasheet.octopart.com:443/2N7002K-Fairchild-Semiconductor-datasheet-68558619.pdf?src-supplier=Newark, ComponentLink13URL=https://datasheet.octopart.com:443/2N7002K-Fairchild-Semiconductor-datasheet-68558619.pdf?src-supplier=Newark, ComponentLink14Description=https://datasheet.octopart.com:443/2N7002K-ON-Semiconductor-datasheet-137315652.pdf?src-supplier=Future+Electronics, ComponentLink14URL=https://datasheet.octopart.com:443/2N7002K-ON-Semiconductor-datasheet-137315652.pdf?src-supplier=Future+Electronics, ComponentLink15Description=https://sigma.octopart.com:443/17343971/technical_drawing/Fairchild-Semiconductor-2N7002K.pdf?src-supplier=Fairchild+Semiconductor, ComponentLink15URL=https://sigma.octopart.com:443/17343971/technical_drawing/Fairchild-Semiconductor-2N7002K.pdf?src-supplier=Fairchild+Semiconductor, ComponentLink16Description=https://datasheet.octopart.com:443/2N7002K-Fairchild-Semiconductor-datasheet-67878677.pdf?src-supplier=Farnell, ComponentLink16URL=https://datasheet.octopart.com:443/2N7002K-Fairchild-Semiconductor-datasheet-67878677.pdf?src-supplier=Farnell, ComponentLink17Description=https://datasheet.octopart.com:443/2N7002K-Fairchild-Semiconductor-datasheet-68650436.pdf?src-supplier=Farnell, ComponentLink17URL=https://datasheet.octopart.com:443/2N7002K-Fairchild-Semiconductor-datasheet-68650436.pdf?src-supplier=Farnell, ComponentLink18Description=https://datasheet.octopart.com:443/2N7002K-Fairchild-Semiconductor-datasheet-78857226.pdf?src-supplier=Farnell, ComponentLink18URL=https://datasheet.octopart.com:443/2N7002K-Fairchild-Semiconductor-datasheet-78857226.pdf?src-supplier=Farnell, ComponentLink19Description=http://sigma.octopart.com:80/150600003/rohs_statement/ON-Semiconductor-2N7002K.pdf?src-supplier=Compliance+Statements, ComponentLink19URL=http://sigma.octopart.com:80/150600003/rohs_statement/ON-Semiconductor-2N7002K.pdf?src-supplier=Compliance+Statements, ComponentLink20Description=http://sigma.octopart.com:80/17343977/reach_statement/Fairchild-Semiconductor-2N7002K.pdf?src-supplier=Compliance+Statements, ComponentLink20URL=http://sigma.octopart.com:80/17343977/reach_statement/Fairchild-Semiconductor-2N7002K.pdf?src-supplier=Compliance+Statements, ComponentLink21Description=http://sigma.octopart.com:80/17343978/materials_sheet/Fairchild-Semiconductor-2N7002K.pdf?src-supplier=Compliance+Statements, ComponentLink21URL=http://sigma.octopart.com:80/17343978/materials_sheet/Fairchild-Semiconductor-2N7002K.pdf?src-supplier=Compliance+Statements, ComponentLink22Description=http://sigma.octopart.com:80/33036988/materials_sheet/Fairchild-Semiconductor-2N7002K.pdf?src-supplier=Compliance+Statements, ComponentLink22URL=http://sigma.octopart.com:80/33036988/materials_sheet/Fairchild-Semiconductor-2N7002K.pdf?src-supplier=Compliance+Statements, ComponentLink23Description=http://sigma.octopart.com:80/33036987/reach_statement/Fairchild-Semiconductor-2N7002K.pdf?src-supplier=Compliance+Statements, ComponentLink23URL=http://sigma.octopart.com:80/33036987/reach_statement/Fairchild-Semiconductor-2N7002K.pdf?src-supplier=Compliance+Statements, ComponentLink24Description=http://sigma.octopart.com:80/reach_statement/ON-Semiconductor-company-79.pdf?src-supplier=Compliance+Statements, ComponentLink24URL=http://sigma.octopart.com:80/reach_statement/ON-Semiconductor-company-79.pdf?src-supplier=Compliance+Statements, ComponentLink25Description=http://sigma.octopart.com:80/rohs_statement/Fairchild-Semiconductor-company-11.pdf?src-supplier=Compliance+Statements, ComponentLink25URL=http://sigma.octopart.com:80/rohs_statement/Fairchild-Semiconductor-company-11.pdf?src-supplier=Compliance+Statements, ComponentLink26Description=http://sigma.octopart.com:80/rohs_statement/Fairchild-Semiconductor-company-10.pdf?src-supplier=Compliance+Statements, ComponentLink26URL=http://sigma.octopart.com:80/rohs_statement/Fairchild-Semiconductor-company-10.pdf?src-supplier=Compliance+Statements, ComponentLink27Description=http://sigma.octopart.com:80/reach_statement/Fairchild-Semiconductor-company-9.pdf?src-supplier=Compliance+Statements, ComponentLink27URL=http://sigma.octopart.com:80/reach_statement/Fairchild-Semiconductor-company-9.pdf?src-supplier=Compliance+Statements, ComponentLink28Description=https://octopart.com:443/opatz8j6/c1?t=nm5kdMlbaAnwpklrVZblZ0nE71AQlgwh7ERqQoEJhKvEfgRp_9FXj7IMoPPC8V_j13LWXOpO2Jxw4bOkneI3J4oQ-Ueqca9fxYR6kFJosDJCZUuoEPm8PptoZzKZNXIWwYdL1v0f_3jxmMMd6AmYg9Y7R4OLdY3QL6Rk6u6ai-3ss5V1K0SdYAJs7A9F18xCMj7KK3OJ0kjjq8to-n9XtuWqv7DBv7T5vrdVNUg03mJ5ApziGpyAB5Qe7qbvoVw8pQA7F0WEglJk1PRa4-p6s3a5dQiLDUC_bYLpYK_Y4Yhi_XqAGpD62eBhzZC41UC6OOQBzi0Qvg0NEKn45CaGve0MJuREN5MOXiQU&src-supplier=Compliance+Statements, ComponentLink28URL=https://octopart.com:443/opatz8j6/c1?t=nm5kdMlbaAnwpklrVZblZ0nE71AQlgwh7ERqQoEJhKvEfgRp_9FXj7IMoPPC8V_j13LWXOpO2Jxw4bOkneI3J4oQ-Ueqca9fxYR6kFJosDJCZUuoEPm8PptoZzKZNXIWwYdL1v0f_3jxmMMd6AmYg9Y7R4OLdY3QL6Rk6u6ai-3ss5V1K0SdYAJs7A9F18xCMj7KK3OJ0kjjq8to-n9XtuWqv7DBv7T5vrdVNUg03mJ5ApziGpyAB5Qe7qbvoVw8pQA7F0WEglJk1PRa4-p6s3a5dQiLDUC_bYLpYK_Y4Yhi_XqAGpD62eBhzZC41UC6OOQBzi0Qvg0NEKn45CaGve0MJuREN5MOXiQU&src-supplier=Compliance+Statements, ComponentLink29Description=https://octopart.com:443/opatz8j6/c1?t=yP1dprRIHwIgdvtjb9FYqRaP3_9HWgrBaL9JkhjecsSuf0n6cINMsFwp5N6FMygctrzVDOAIh4pqo1B7NhLuP4EfhfgMmii0srxvh2XxIZc2UWh74_aW-dJirl-sIPHhCpS4y3FsLHcYkfI7uz7Zobk3yF8mMTCkQ2uO5Ev9E03_1hZh6X3YtwOYI82JGjIbo8QvUN_FXJ9Womd2nii1m-sUjS3nWbw_QaYVMn5ZbNRqutWyxY-yUPVqm24VyLJbSNi-am4bjCcC6TDsH0hBYj3fGvqNFGx_58D2X5w3EoEA4KlvTi0mcDs5gj__gSGJCxXMmsSQPns7LYMZtqXHHcrx3ZG_xUyLjZk&src-supplier=Compliance+Statements, ComponentLink29URL=https://octopart.com:443/opatz8j6/c1?t=yP1dprRIHwIgdvtjb9FYqRaP3_9HWgrBaL9JkhjecsSuf0n6cINMsFwp5N6FMygctrzVDOAIh4pqo1B7NhLuP4EfhfgMmii0srxvh2XxIZc2UWh74_aW-dJirl-sIPHhCpS4y3FsLHcYkfI7uz7Zobk3yF8mMTCkQ2uO5Ev9E03_1hZh6X3YtwOYI82JGjIbo8QvUN_FXJ9Womd2nii1m-sUjS3nWbw_QaYVMn5ZbNRqutWyxY-yUPVqm24VyLJbSNi-am4bjCcC6TDsH0hBYj3fGvqNFGx_58D2X5w3EoEA4KlvTi0mcDs5gj__gSGJCxXMmsSQPns7LYMZtqXHHcrx3ZG_xUyLjZk&src-supplier=Compliance+Statements, Contact Plating=Tin, Drain to Source Voltage (Vdss)=60V, Element Configuration=Single, Height=1.11mm, Lead Free="Lead Free", Length=2.92mm, Lifecycle Status=Production, Manufacturer Part Number=2N7002K, Max Operating Temperature=150°C, Min Breakdown Voltage=60V, Mounting Technology="Surface Mount", Number of Channels=1, Number of Elements=1, Number of Terminals=3, Pins=3, Pricing="1=0.33, 10=0.203, 100=0.1271, 500=0.09384, 1000=0.08309 (USD)", Radiation Hardening=No, Rds On Max=2Ω, REACH SVHC=Yes, RoHS=Compliant, Schedule B="8541210080, 8541210080|8541210080|8541210080|8541210080|8541210080", Stock=393574, Supplier=DigiKey, Supplier 1=DigiKey, Supplier Part Number 1=2N7002KCT-ND, Turn-Off Delay Time=55.8ns, Turn-On Delay Time=12.2ns, Voltage=60V, Width=1.3mm